# Altium PCB esp32c3phils.PcbDoc (part 3 of 3)
Units mil, origin at the board's own origin, x right, y up, seen from the top; angles counter-clockwise.
Board outline 2756.04 x 1955.51 mil, 6 copper layers (Top Layer, Layer 1, Layer 3, Layer 4, Layer 2, Bottom Layer), stack 54.512 mil thick; 66 components, 48 nets, 263 pads, 93 vias.
Unrouted connection lines stored in the file: 25.
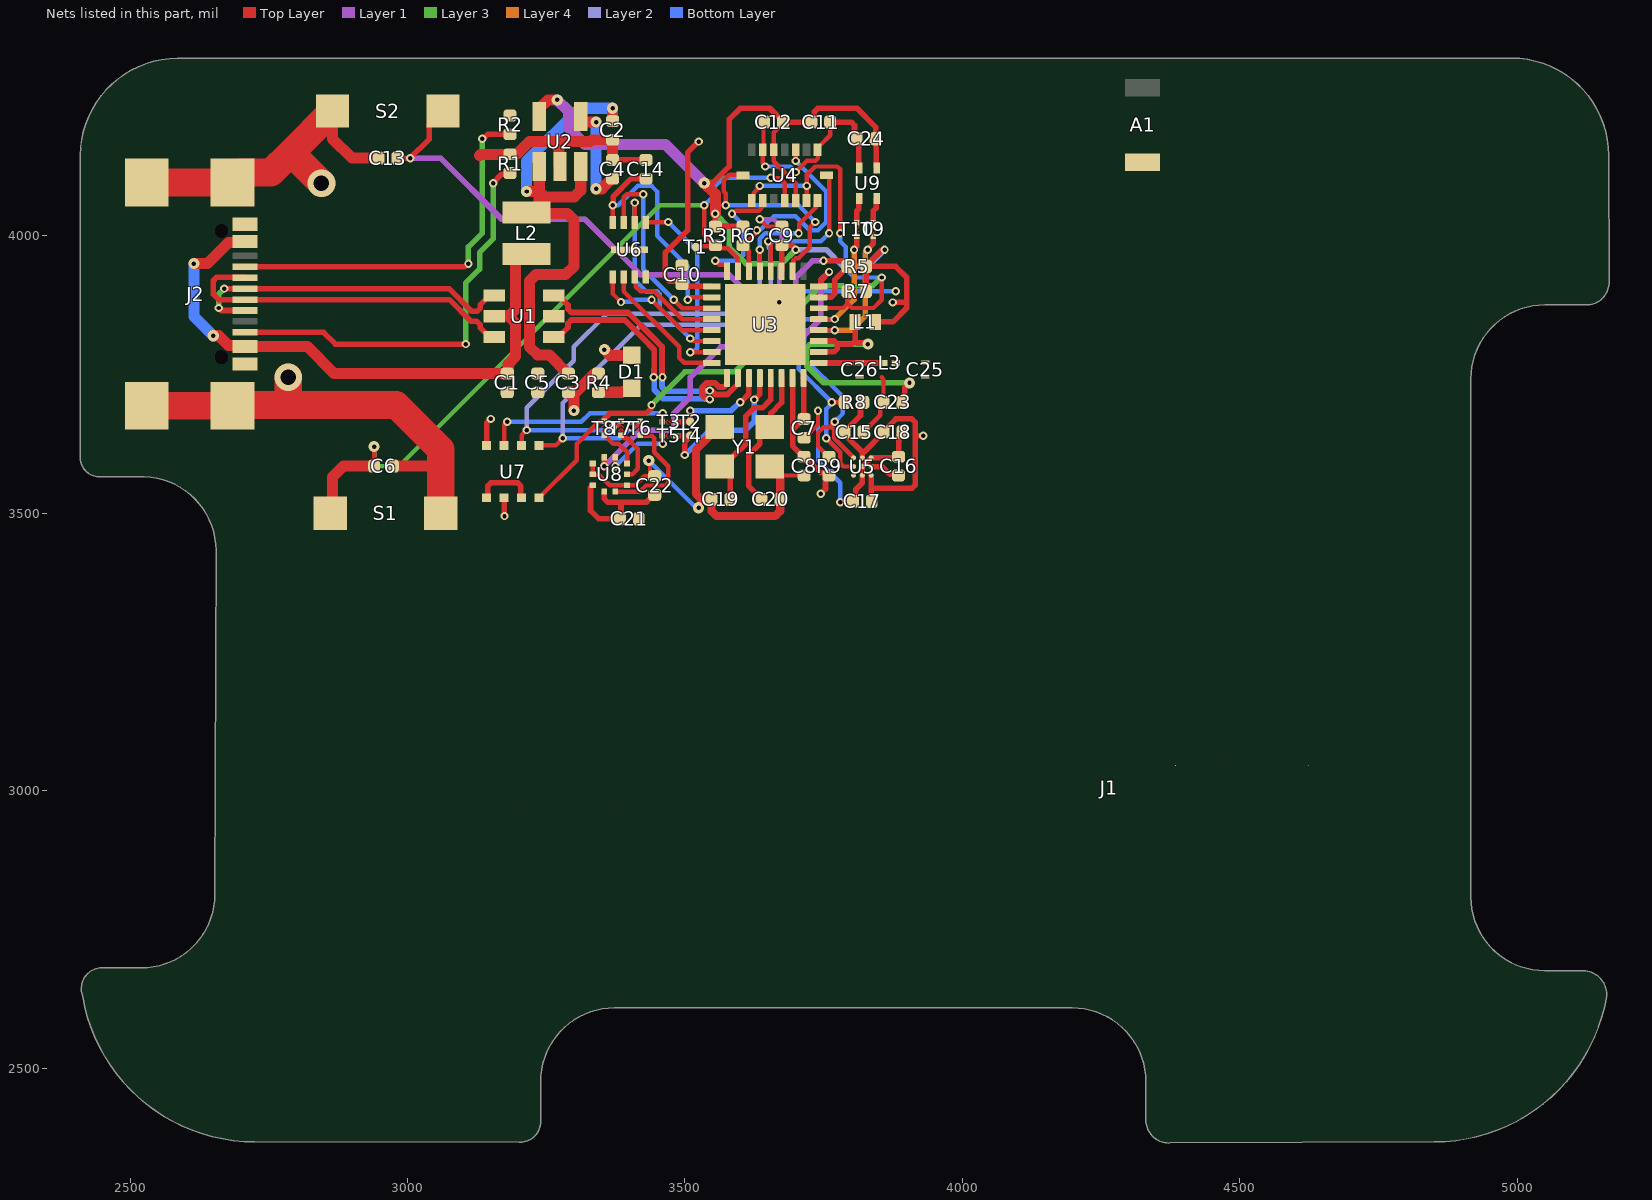
[diagram p6: the nets of this part, all layers, seen from the top]

## Keep-outs (continued)
Keep-Out Layer: (continued)
  lines w10: 2415,3600.45 2414.99,4145.2 cw(c2592.5,4142.95) 2590,4320.45 4995,4320.45 cw(c4995,4145.45) 5170,4145.45 5171.03,3916.49 cw(c5130,3916.49) 5130,3875.45 5055,3875.45 ccw(c5055,3742.38) 4921.93,3742.38 4921.93,2808.52 ccw(c5055,2808.52) 5055,2675.45 5125.86,2675.45 ; 2415.05,3601.43 ccw(c2451.02,3601.43) 2451.02,3565.45 ; 2419.44,2629.4 ccw(c2730,2681.87) 2730,2366.91 3206.38,2366.6 ; 2419.64,2629.47 cw(c2455,2642.97) 2460,2680.49 2525,2680.45 ccw(c2525,2813.52) 2658.07,2813.53 2660,3435.45 ; 2451.2,3565.45 2530,3565.45 ; 2531.01,3565.42 cw(c2527.5,3432.97) 2660,3432.97 ; 3209.03,2366.61 ccw(c3209.03,2402.59) 3245.01,2402.59 3245,2475.41 cw(c3378.07,2475.41) 3378.07,2608.48 ; 3376.3,2608.48 4203.07,2608.48 cw(c4203.08,2475.41) 4336.15,2475.41 ; 4336.07,2405.98 ccw(c4377.11,2405.98) 4377.11,2364.95 ; 4336.1,2405.95 4336.1,2475.45 ; 4379.61,2365 4855.98,2366.91 ccw(c4855.98,2681.87) 5166.53,2629.35 ccw(c5123.26,2632.4) 5125.24,2675.73 ; 2410,4145.2 cw(c2587.5,4142.95) 2585,4320.45 ; 2410,4145.2 cw(c2587.5,4142.95) 2585,4320.45 ; 2409.99,4145.2 2410,3600.45 2409.99,4145.2 ; 2455,2680.49 ccw(c2450,2642.97) 2414.64,2629.47 cw(c2450,2642.97) 2455,2680.49 ; 2455,2680.49 2520,2680.45 ; 2455,2680.49 2520,2680.45 ; 2520,2680.45 ccw(c2520,2813.52) 2653.07,2813.53 ; 2520,2680.45 ccw(c2520,2813.52) 2653.07,2813.53 ; 2585,4320.45 4990,4320.45 ; 2585,4320.45 4990,4320.45 ; 2653.07,2813.53 2655,3435.45 2653.07,2813.53 ; 2725,2366.91 cw(c2725,2681.87) 2414.44,2629.4 ccw(c2725,2681.87) 2725,2366.91 ; 2725,2366.91 3201.38,2366.6 2725,2366.91 ; 3240.01,2402.59 cw(c3204.03,2402.59) 3204.03,2366.61 ccw(c3204.03,2402.59) 3240.01,2402.59 ; 3240.01,2402.59 3240,2475.41 ; 3240.01,2402.59 3240,2475.41 ; 3240,2475.41 cw(c3373.07,2475.41) 3373.07,2608.48 ccw(c3373.07,2475.41) 3240,2475.41 ; 4198.07,2608.48 cw(c4198.08,2475.41) 4331.15,2475.41 ccw(c4198.08,2475.41) 4198.07,2608.48 ; 4198.07,2608.48 3371.3,2608.48 4198.07,2608.48 ; 4850.98,2366.91 ccw(c4850.98,2681.87) 5161.53,2629.35 ; 4850.98,2366.91 ccw(c4850.98,2681.87) 5161.53,2629.35 ; 4850.98,2366.91 4374.61,2365 4850.98,2366.91 ; 4916.93,2808.52 ccw(c5050,2808.52) 5050,2675.45 ; 4916.93,2808.52 ccw(c5050,2808.52) 5050,2675.45 ; 4916.93,2808.52 4916.93,3742.38 ; 4916.93,2808.52 4916.93,3742.38 ; 4916.93,3742.38 cw(c5050,3742.38) 5050,3875.45 ; 4916.93,3742.38 cw(c5050,3742.38) 5050,3875.45 ; 4990,4320.45 cw(c4990,4145.45) 5165,4145.45 ; 4990,4320.45 cw(c4990,4145.45) 5165,4145.45 ; 5050,2675.45 5120.86,2675.45 5050,2675.45 ; 5050,3875.45 5125,3875.45 ; 5050,3875.45 5125,3875.45 ; 5125,3875.45 ccw(c5125,3916.49) 5166.04,3916.49 ; 5125,3875.45 ccw(c5125,3916.49) 5166.04,3916.49 ; 5161.53,2629.35 ccw(c5118.26,2632.4) 5120.24,2675.73 cw(c5118.26,2632.4) 5161.53,2629.35 ; 5165,4145.45 5166.03,3916.49 ; 5165,4145.45 5166.03,3916.49 ; 2410.05,3601.43 ccw(c2446.02,3601.43) 2446.02,3565.45 cw(c2446.02,3601.43) 2410.05,3601.43 ; 2446.2,3565.45 2525,3565.45 2446.2,3565.45 ; 2526.01,3565.42 cw(c2522.5,3432.97) 2655,3432.97 ccw(c2522.5,3432.97) 2526.01,3565.42 ; 4331.07,2405.98 ccw(c4372.11,2405.98) 4372.11,2364.95 cw(c4372.11,2405.98) 4331.07,2405.98 ; 4331.1,2405.95 4331.1,2475.45 4331.1,2405.95

## Silkscreen, mask and mechanical layers (free items; w line width, h text height)
Bottom Overlay:
  lines w10: 2915,2920.45 2915,3100.45 3735,3100.45 3735,2920.45 2915,2920.45

## Text inside footprints (layer, text, board x,y; h text height)
.1: Bottom Overlay "5V" at 2980.51,3181.55 h31.5 r90; Bottom Overlay "USB_DM" at 3065.26,3306.55 h31.5 r90; Bottom Overlay "USB_DP" at 3150.26,3306.55 h31.5 r90; Bottom Overlay "GND" at 3225.51,3211.55 h31.5 r90; Bottom Overlay "UART3_TX" at 3305.26,3366.55 h31.5 r90; Bottom Overlay "UART3_RX" at 3380.26,3366.55 h31.5 r90; Bottom Overlay "GPIO2_IO12" at 3460.26,3411.55 h31.5 r90; Bottom Overlay "I2C2_SCL" at 3540.26,3356.55 h31.5 r90; Bottom Overlay "I2C2_SDA" at 3625.26,3356.55 h31.5 r90; Bottom Overlay "3v3" at 3700.51,3206.55 h31.5 r90; Bottom Overlay "3v3" at 3907.5,3208.94 h31.5 r90; Bottom Overlay "I2C4_SDA" at 3986.75,3361.55 h31.5 r90; Bottom Overlay "I2C4_SCL" at 4066.75,3356.55 h31.5 r90; Bottom Overlay "GPIO2_IO12" at 4141.75,3411.55 h31.5 r90; Bottom Overlay "UART4_RX" at 4222.5,3363.94 h31.5 r90; Bottom Overlay "UART4_TX" at 4307.5,3368.94 h31.5 r90; Bottom Overlay "GND" at 4387.5,3208.94 h31.5 r90; Bottom Overlay "SOM_RST" at 4547.5,3338.94 h31.5 r90; Bottom Overlay "5V" at 4637.5,3178.94 h31.5 r90; Bottom Overlay "ADC4" at 4639,2889 h25 r90; Bottom Overlay "ADC3" at 4557,2887 h25 r90; Bottom Overlay "PWM2" at 4482,2882 h25 r90; Bottom Overlay "GPIO2_IO13" at 4402.83,2887 h25 r90; Bottom Overlay "GPIO2_IO14" at 4322.83,2887 h25 r90; Bottom Overlay "ESPI2_SS0" at 4237.83,2886.55 h25 r90; Bottom Overlay "ESPI2_SCLK" at 4157.83,2887 h25 r90; Bottom Overlay "ESPI2_MISO" at 4072.83,2886.55 h25 r90; Bottom Overlay "ESPI2_MOSI" at 3997.83,2886.55 h25 r90; Bottom Overlay "GPIO1_IO13" at 3917.83,2886.55 h25 r90; Bottom Overlay "GPIO4_IO28" at 3694.83,2899 h25 r90; Bottom Overlay "GPIO2_IO18" at 3614.83,2899 h25 r90; Bottom Overlay "GPIO2_IO17" at 3539.83,2899 h25 r90; Bottom Overlay "GPIO2_IO16" at 3454.83,2899 h25 r90; Bottom Overlay "GPIO2_IO15" at 3374.83,2899 h25 r90; Bottom Overlay "DBG_RX" at 3294.83,2899 h25 r90; Bottom Overlay "DBG_TX" at 3214.83,2899 h25 r90; Bottom Overlay "PWM1" at 3134,2899 h25 r90; Bottom Overlay "ADC2" at 3054,2899 h25 r90; Bottom Overlay "ADC1" at 2974,2899 h25 r90; Bottom Overlay "RTC" at 4467.5,3208.94 h31.5 r90
U1: Mechanical 13 "*" at 3242,3848 h50 r180
U8: Mechanical 13 "*" at 3380.16,3563 h50 r90